# Altium PCB Buck-Boost-Converter_PCB.PcbDoc (part 1 of 2)
Units mm, origin at the board's own origin, x right, y up, seen from the top; angles counter-clockwise.
Board outline 189.74 x 81.03 mm, 4 copper layers (Top Layer, GND Layer, Pwr Layer, Bottom Layer), stack 2.398 mm thick; 93 components, 21 nets, 175 pads, 81 vias.
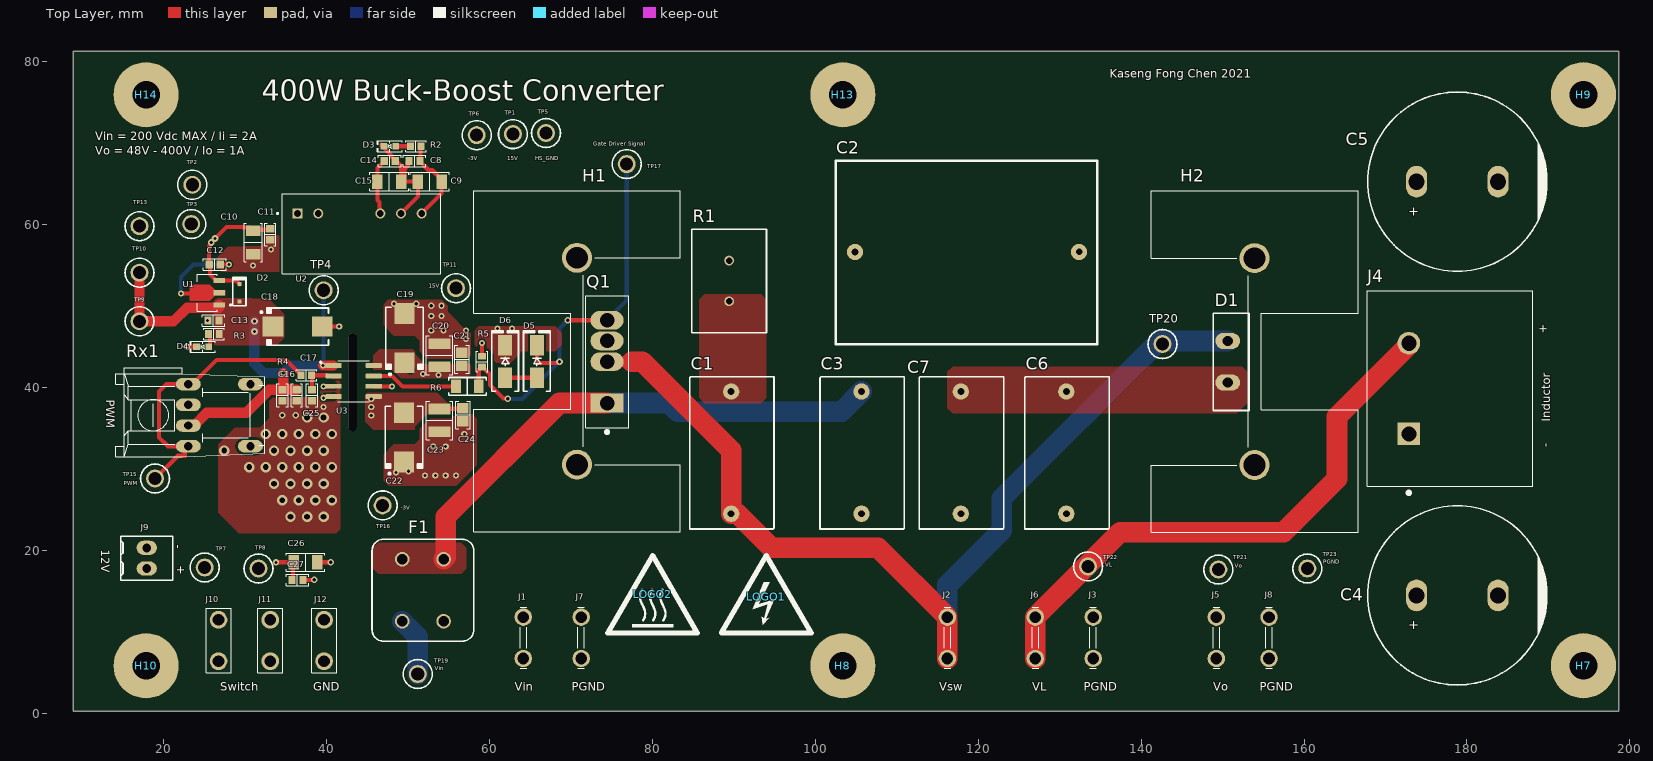
[diagram p0: Top Layer view]
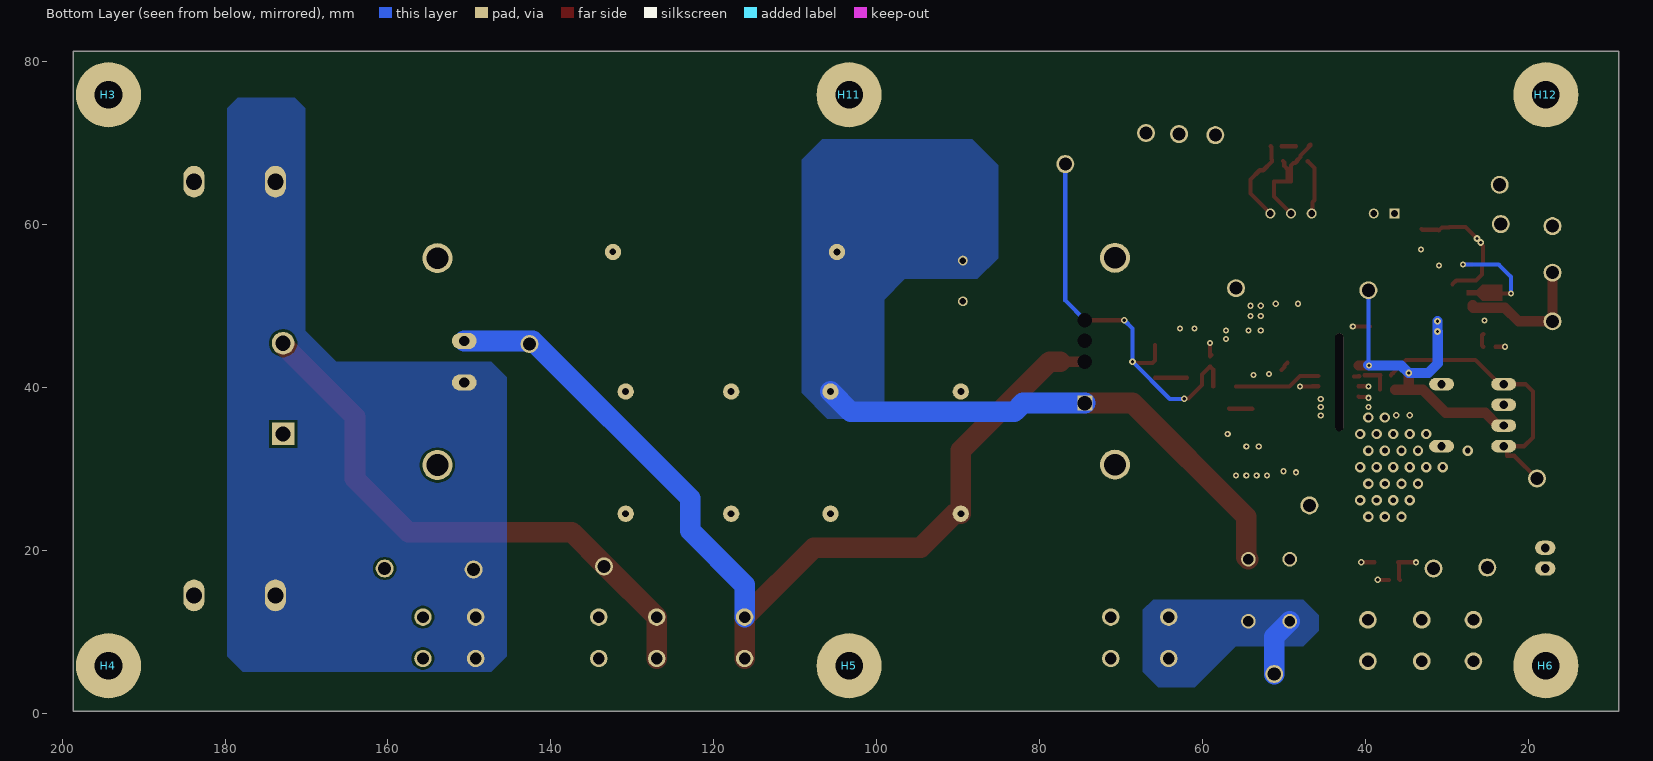
[diagram p1: Bottom Layer view, seen from below]
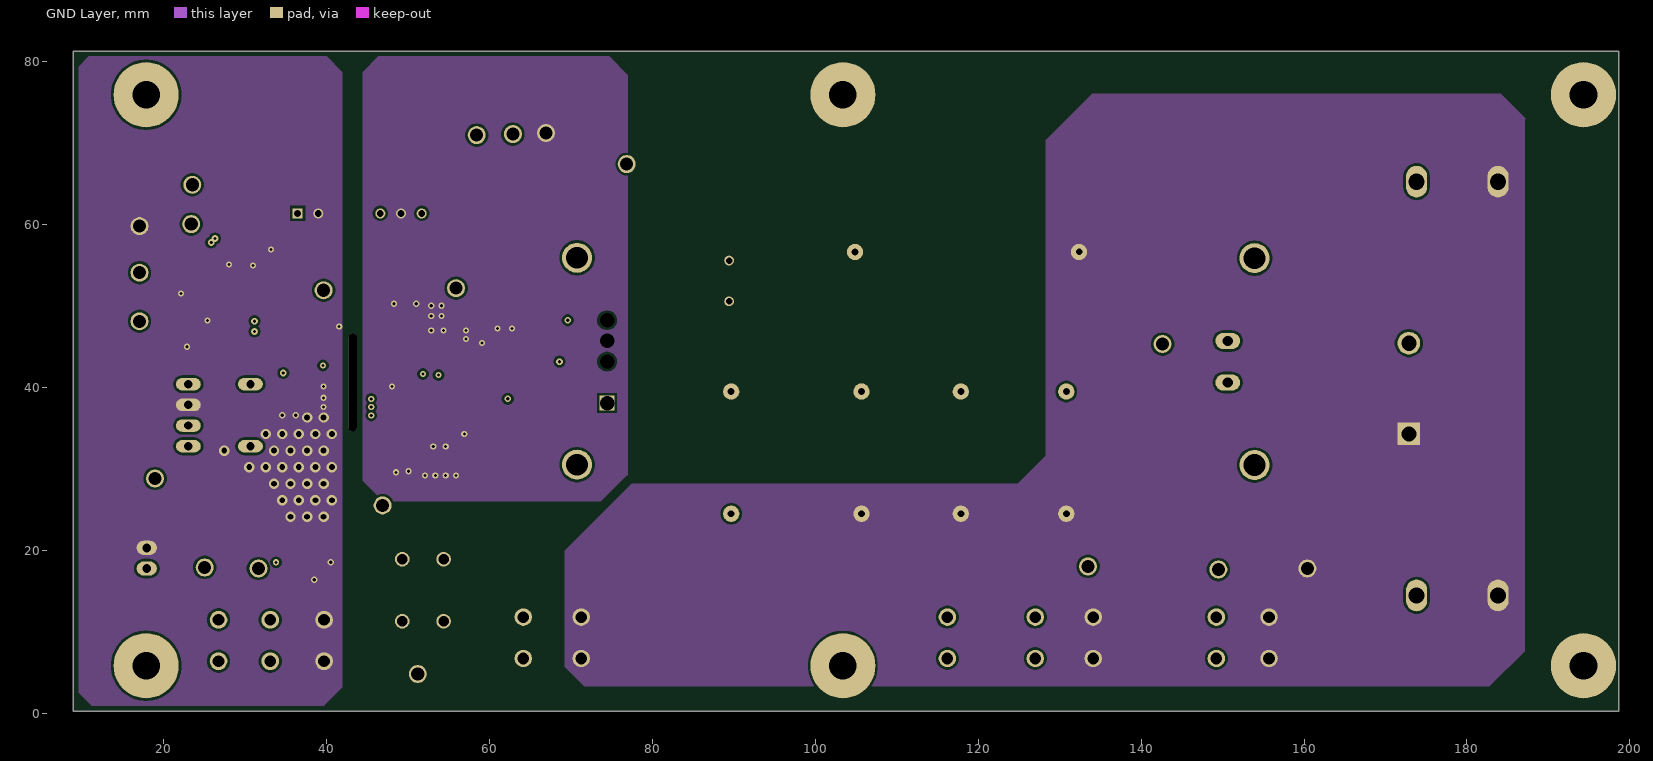
[diagram p2: GND Layer]
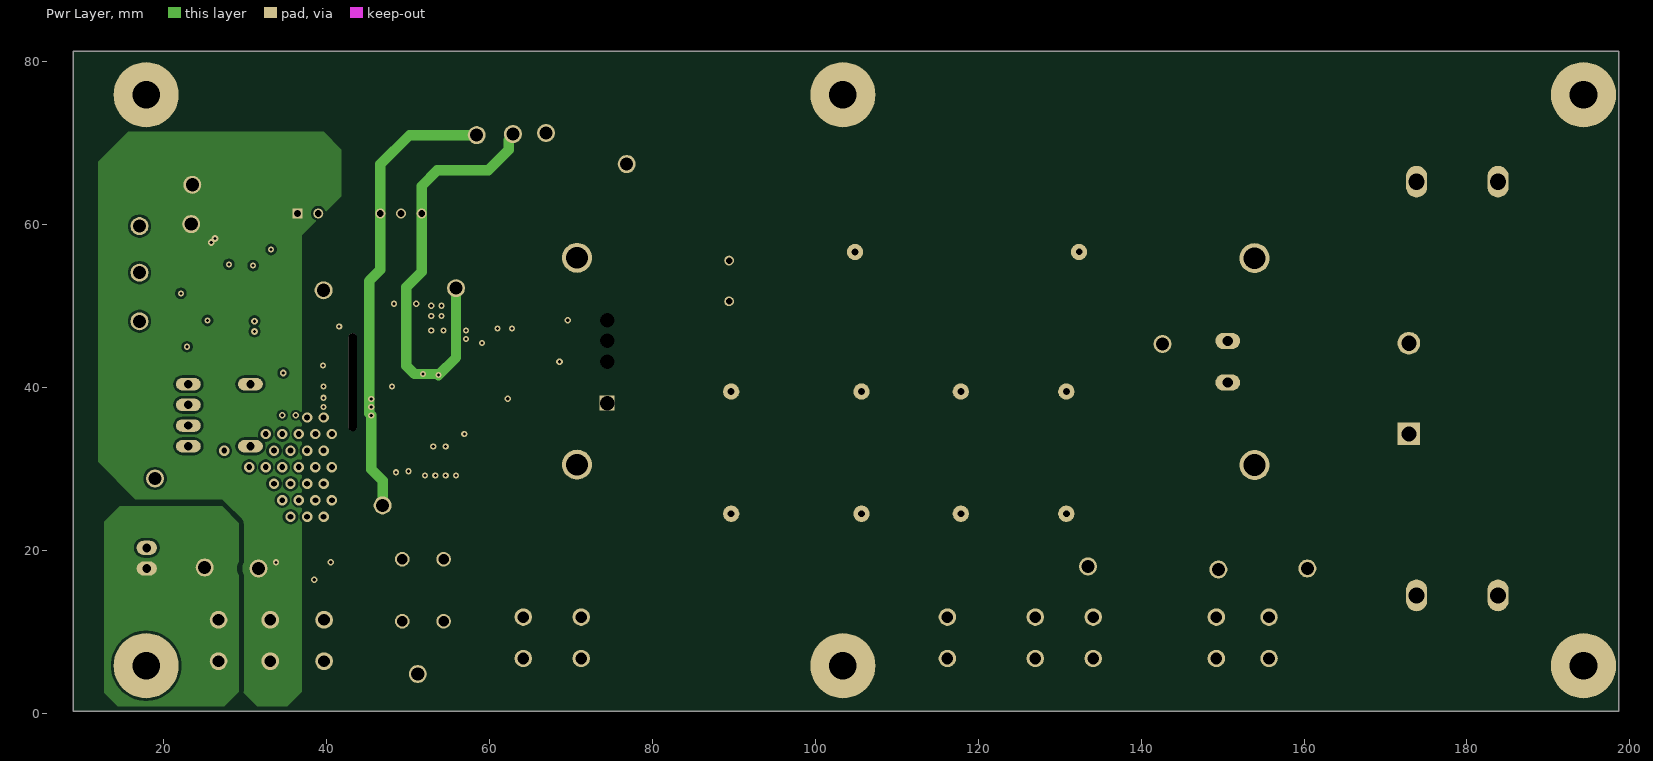
[diagram p3: Pwr Layer]
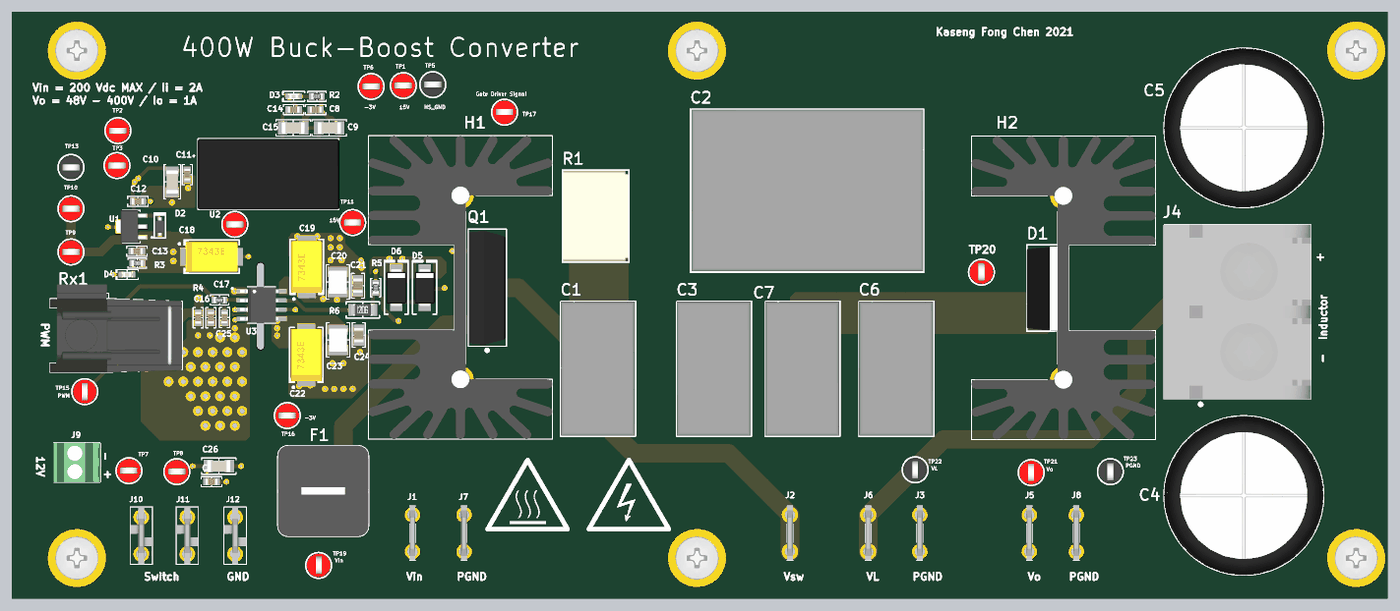
[diagram p4: 3D render of the assembled board from above, using the file's embedded part models]

## Layer stack, top to bottom
Top Solder: solder mask 0.0102, Solder Resist, Dk 3.5
Top Layer: signal copper 0.0711
Dielectric 1: prepreg 0.3048, FR-4-High Tg, Dk 4.2
GND Layer: signal copper 0.0711
Dielectric 2: core 1.5037, FR-4-High Tg, Dk 4.5
Pwr Layer: signal copper 0.0711
Dielectric 3: prepreg 0.3048, FR-4-High Tg, Dk 4.2
Bottom Layer: signal copper 0.0711
Bottom Solder: solder mask 0.0102, Solder Resist, Dk 3.5

## Board outline
8.89,0.254 198.628,0.254 198.628,81.28 8.89,81.28

## Design rules (kind name [scope] priority, off if disabled: settings)
AcuteAngle [All] p1: minimum=4.50000000000000E+0001 checktracksonly=FALSE
AssemblyTestPointUsage [All] p1: valid=2
BoardOutlineClearance BoardOutlineClearance_MountingHoles [OnCopper and InComponentClass('Mounting Holes')] p1: gap=1.016 ignorepadtopadclearanceinfootprint=FALSE
BoardOutlineClearance BoardOutlineClearance_Poly [OnCopper and IsPoly] p2: gap=0.635 ignorepadtopadclearanceinfootprint=FALSE
BoardOutlineClearance [OnCopper and Not InComponentClass('Logo') and not InComponentClass('FiducialMark') and not InRegion(1000,500,4000,800) and not InPoly] p3: gap=0 ignorepadtopadclearanceinfootprint=FALSE
Clearance Clearance_MH [InPadClass('mh')] p1: gap=1.5 ignorepadtopadclearanceinfootprint=FALSE except(0: Arc-Hole Track-Hole SMDPad-Hole THPad-Hole Via-Hole Fill-Hole Poly-Hole Region-Hole Text-Hole)
Clearance Clearance_HV_Bottom_Layer [InLayerClass('Bottom_Layer') and InPolygon vs InNetClass('HV_Class')] p2: gap=3 ignorepadtopadclearanceinfootprint=FALSE except(0: Arc-Hole Track-Hole SMDPad-Hole THPad-Hole Via-Hole Fill-Hole Poly-Hole Region-Hole Text-Hole)
Clearance Clearance_HV_TOP_Layer [InLayerClass('Top_Layer') and InPolygon vs InNetClass('HV_Class')] p3: gap=3 ignorepadtopadclearanceinfootprint=FALSE except(0: Arc-Hole Track-Hole SMDPad-Hole THPad-Hole Via-Hole Fill-Hole Poly-Hole Region-Hole Text-Hole)
Clearance Clearance_HV_PwrLayer [InLayerClass('PWR Class') and InPolygon vs InNetClass('HV_Class')] p4: gap=3 ignorepadtopadclearanceinfootprint=FALSE except(0: Arc-Hole Track-Hole SMDPad-Hole THPad-Hole Via-Hole Fill-Hole Poly-Hole Region-Hole Text-Hole)
Clearance Clearance_HV_GndLayer [InLayerClass('GND_Layer') and InPolygon vs InNetClass('HV_Class')] p5: gap=1.524 ignorepadtopadclearanceinfootprint=FALSE except(0: Arc-Hole Track-Hole SMDPad-Hole THPad-Hole Via-Hole Fill-Hole Poly-Hole Region-Hole Text-Hole)
Clearance "Clearance_Poly to Poly" [InPoly vs InPoly] p6: gap=0.635 ignorepadtopadclearanceinfootprint=FALSE except(0: Arc-Hole Track-Hole SMDPad-Hole THPad-Hole Via-Hole Fill-Hole Poly-Hole Region-Hole Text-Hole)
Clearance Clearance_Poly [InPolygon] p7: gap=0.305 ignorepadtopadclearanceinfootprint=FALSE except(0: Arc-Hole Track-Hole SMDPad-Hole THPad-Hole Via-Hole Fill-Hole Poly-Hole Region-Hole Text-Hole)
Clearance [All] p8: gap=0.2 ignorepadtopadclearanceinfootprint=FALSE except(0: Arc-Hole Track-Hole SMDPad-Hole THPad-Hole Via-Hole Fill-Hole Poly-Hole Region-Hole Text-Hole)
ComponentClearance ComponentClearance_MountingHoles_FiducialMarks [InComponentClass('Mounting Holes') vs InComponentClass('FiducialMark')] p1: gap=0.762 collisioncheckmode=3 verticalgap=0.254 showdistances=FALSE
ComponentClearance ComponentClearance_Shunt [InComponentClass('Header') vs InComponentClass('Shunt')] p2: gap=0 collisioncheckmode=3 verticalgap=0 showdistances=FALSE
ComponentClearance ComponentClearance_Logo [InComponentClass('Logo')] p3: gap=0.025 collisioncheckmode=3 verticalgap=0.025 showdistances=FALSE
ComponentClearance ComponentClearance_ScrewToNut [(HasFootprint('NY PMS 440 0025 PH')) vs (HasFootprint('Keystone_1902C'))] p4: gap=0.025 collisioncheckmode=3 verticalgap=0.025 showdistances=FALSE
ComponentClearance ComponentClearance_MountingHoles [InComponentClass('Mounting Holes')] p5: gap=0.762 collisioncheckmode=3 verticalgap=2540 showdistances=FALSE
ComponentClearance ComponentClearance_SmallPassives [HasFootprint('0201*') or HasFootprint('0402*') or HasFootprint('0508') or HasFootprint('0603*') or HasFootprint('0612') or HasFootprint('0805*') or HasFootprint('0815*') or HasFootprint('0830*') or HasFootprint('1206*') or HasFootprint('1210*') or HasFootprint('1808*') or HasFootprint('1812*') or HasFootprint('1825*') or HasFootprint('2010*') or HasFootprint('2220*') or HasFootprint('2225*') or HasFootprint('2512*') or HasFootprint('2728*') or HasFootprint('3518*') vs HasFootprint('0201*') or HasFootprint('0402*') or HasFootprint('0508') or HasFootprint('0603*') or HasFootprint('0612') or HasFootprint('0805*') or HasFootprint('0815*') or HasFootprint('0830*') or HasFootprint('1206*') or HasFootprint('1210*') or HasFootprint('1808*') or HasFootprint('1812*') or HasFootprint('1825*') or HasFootprint('2010*') or HasFootprint('2220*') or HasFootprint('2225*') or HasFootprint('2512*') or HasFootprint('2728*') or HasFootprint('3518*')] p6: gap=0 collisioncheckmode=3 verticalgap=0 showdistances=FALSE
ComponentClearance ComponentClearance_THtoSMT [IsThruComponent vs IsSMTComponent] p7: gap=0 collisioncheckmode=3 verticalgap=0 showdistances=FALSE
ComponentClearance ComponentClearance_THtoTH [IsThruComponent vs IsThruComponent] p8: gap=0 collisioncheckmode=3 verticalgap=0 showdistances=FALSE
ComponentClearance [All] p9: gap=0 collisioncheckmode=3 verticalgap=0 showdistances=FALSE
DiffPairsRouting [All] p1: maxlimit=0.254 minlimit=0.2 mostfreqgap=0.2 toplayer_minwidth=0.254 toplayer_maxwidth=0.254 toplayer_prefwidth=0.254 midlayer1_minwidth=0.254 midlayer1_maxwidth=0.254 midlayer1_prefwidth=0.254 midlayer2_minwidth=0.254 midlayer2_maxwidth=0.254 midlayer2_prefwidth=0.254 bottomlayer_minwidth=0.254 bottomlayer_maxwidth=0.254 bottomlayer_prefwidth=0.254 maxuncoupledlength=25.4
FabricationTestPointUsage TestPointUsage [All] p1: valid=2 allowmultiple=FALSE
FabricationTestpoint Testpoint [All] p1: side=3 testpointundercomponent=TRUE minsize=1.016 maxsize=2.54 preferedsize=1.524 minholesize=0 maxholesize=1.016 preferedholesize=0.813 testpointgrid=0.025 allowsidetop=TRUE allowsidebottom=TRUE usegrid=TRUE gridtolerance=0
FanoutControl Fanout_LCC [IsLCC] p1: bgadir=Out bgaviamode=Centered fanoutstyle=Auto fanoutdirection=Alternating viagrid=0.025 // Fanout_LCC (Default Rule)
FanoutControl Fanout_BGA [IsBGA] p2: bgadir=Out bgaviamode=Centered fanoutstyle=Auto fanoutdirection=Alternating viagrid=0.025 // Fanout_BGA (Default Rule)
FanoutControl Fanout_Default [All] p4: bgadir=Out bgaviamode=Centered fanoutstyle=Auto fanoutdirection=Alternating viagrid=0.025 // Fanout_Default (Default Rule)
FanoutControl Fanout_Small [(CompPinCount < 5)] p5: bgadir=Out bgaviamode=Centered fanoutstyle=Auto fanoutdirection=OutThenIn viagrid=0.025 // Fanout_Small (Default Rule)
Height [All] p1: minheight=0 maxheight=63.5 prefheight=12.7
HoleSize [All] p1: absolutevalues=TRUE maxlimit=25.4 minlimit=0.2 maxpercent=80.000 minpercent=20.000
MinimumAnnularRing MinimumAnnularRing_ThermalPadVias [IsVia and InAnyComponent] p1: minimumring=0.15
MinimumAnnularRing [All] p2: minimumring=0.14
MinimumSolderMaskSliver MinimumSolderMaskSliver_Logo [InComponentClass('Logo') vs InComponentClass('Logo')] p1: minsoldermaskwidth=0.018
MinimumSolderMaskSliver [All] p2: minsoldermaskwidth=0.1
PlaneConnect [All] p1: planeconnectstyle=Direct reliefexpansion=0.254 reliefentries=4 reliefconductorwidth=0.254 reliefairgap=0.254
PolygonConnect [All] p1: connectstyle=Direct reliefconductorwidth=0.254 reliefentries=4 polygonreliefangle="90 Angle" airgapwidth=0.254
RoutingVias ThermalPadVias [IsVia and InAnyComponent] p1: holewidth=0.2 width=0.5 viastyle="Through Hole" minholewidth=0.2 minwidth=0.5 maxholewidth=0.33 maxwidth=0.6
RoutingVias [All] p2: holewidth=0.406 width=0.813 viastyle="Through Hole" minholewidth=0.305 minwidth=0.61 maxholewidth=0.711 maxwidth=1.321
SilkToSilkClearance SilkToSilkClearance_Pb-FreeLogo [(HasFootprint('Pb-Free_Overlay_Medium') OR HasFootprint('Pb-Free_Overlay_Small')) vs (HasFootprint('Pb-Free_Overlay_Medium') OR HasFootprint('Pb-Free_Overlay_Small'))] p1: silktosilkclearance=0
SilkToSilkClearance [All] p2: silktosilkclearance=0.102
SilkToSolderMaskClearance SilkToComponentPadClearance [(IsPad or IsFill or IsRegion) and InAnycomponent] p1: minsilkscreentomaskgap=0.127 clearancetoexposedcopper=TRUE
SilkToSolderMaskClearance "Silk to Solder Mask Opening" [All] p2: minsilkscreentomaskgap=0.102 clearancetoexposedcopper=FALSE
SolderMaskExpansion [All] p1: expansion=0.05 istentingtop=FALSE
Width [All] p1: maxlimit=2.54 minlimit=0.229 preferedwidth=0.508 checkconnectedcopper=TRUE
15 further rules are at their usual default settings.

## Classes and differential pairs
component class Hardware: H3 H4 H5 H6 H7 H8 H9 H10 H11 H12 H13 H14 LOGO1 LOGO2
component class GateDriver: C8 C9 C10 C11 C12 C13 C14 C15 C16 C17 C18 C19 C20 C21 C22 C23 C24 C25 C26 C27 D2 D3 D4 D5 D6 J9 J10 J11 J12 R2 R3 R4 R5 R6 Rx1 TP1 TP2 TP3 TP4 TP5 TP6 TP7 TP8 TP9 TP10 TP11 TP13 TP15 TP16 TP17 U1 U2 U3
component class PowerCard: C1 C2 C3 C4 C5 C6 C7 D1 F1 H1 H2 J1 J2 J3 J4 J5 J6 J7 J8 L1 Q1 R1 TP19 TP20 TP21 TP22 TP23

## Components (designator, comment, footprint, x,y, rotation, side; value= is the part's Value field where it differs from the comment)
C1 "220nF" R75PI32204030J 89.662,32.004 r270 top
C2 "25uF" C4AQLBU5250A12K 118.618,56.642 r0 top
C3 "220nF" R75PI32204030J 105.664,32.004 r270 top
C4 "100uF" CAP_MXC_22x35_RUB 178.816,14.478 r180 top
C5 "100uF" CAP_MXC_22x35_RUB 178.816,65.278 r180 top
C6 "220nF" R75PI32204030J 130.81,32.004 r270 top
C7 "220nF" R75PI32204030J 117.856,32.004 r270 top
C8 "1µF" "CAP 0603_1608" 50.785,67.793 r0 top
C9 "10µF" "CAP 1206_3216 - 1.8MM" 52.652,65.278 r0 top
C10 "4.7µF" "CAP 1206_3216 - 1.8MM" 30.988,57.808 r90 top
C11 "0.1µF" "CAP 0603_1608" 33.071,58.801 r90 top
C12 "1µF" "CAP 0603_1608" 26.238,55.118 r180 top
C13 "1µF" "CAP 0603_1608" 26.1,48.235 r0 top
C14 "1µF" "CAP 0603_1608" 47.737,67.793 r0 top
C15 "10µF" "CAP 1206_3216 - 1.8MM" 47.678,65.278 r0 top
C16 "0.1µF" "CAP 0603_1608" 34.569,39.04 r90 top
C17 "0.1µF" "CAP 0603_1608" 36.322,39.051 r90 top
C18 "10µF" "CAP POL 2917_7343" 36.424,47.473 r0 top
C19 "10µF" "CAP POL 2917_7343" 49.555,46.076 r90 top
C20 "10µF" "CAP 1210_3225 - 2.8MM" 53.823,43.967 r90 top
C21 "0.22µF" "CAP 0805_2012" 56.591,43.472 r90 top
C22 "10µF" "CAP POL 2917_7343" 49.479,33.884 r90 top
C23 "10µF" "CAP 1210_3225 - 2.8MM" 53.873,35.963 r90 top
C24 "0.22µF" "CAP 0805_2012" 56.718,36.64 r90 top
C25 "100pF" "CAP 0603_1608" 38.202,39.065 r90 top
C26 "4.7µF" "CAP 1206_3216 - 1.8MM" 37.412,18.542 r180 top
C27 "0.1µF" "CAP 0603_1608" 36.409,16.383 r180 top
D1 "Schottky Diode" C6D06065A 150.622,43.053 r90 top
D2 "PMEG6010CEJ,115" SOD-323F 29.286,51.638 r270 top
D3 "Green" "LED 0603_1608 GREEN" 47.74,69.621 r180 top
D4 "Green" "LED 0603_1608 GREEN" 24.765,45.009 r180 top
D5 "SMAJ5.0A" "DO214AC SMA" 65.811,43.205 r90 top
D6 "SMAJ16A" "DO214AC SMA" 61.9,43.205 r90 top
F1 "3101.0040" SCHURTER_3101_0040 51.816,15.113 r180 top
H1 "Disipador de 3.3.C/W" HSINK_6399BG 70.739,43.231 r90 top
H2 "Disipador de 3.3.C/W" HSINK_6399BG 153.924,43.18 r270 top
H3 "24438" Keystone24438 194.31,75.946 r180 bottom
H4 "24438" Keystone24438 194.31,5.842 r180 bottom
H5 "24438" Keystone24438 103.378,5.842 r180 bottom
H6 "24438" Keystone24438 17.831,5.842 r180 bottom
H7 "MPMS 003 0005 PH" BuildingFastener_MPMS_003_0005_PH 194.31,5.842 r0 top
H8 "MPMS 003 0005 PH" BuildingFastener_MPMS_003_0005_PH 103.378,5.842 r0 top
H9 "MPMS 003 0005 PH" BuildingFastener_MPMS_003_0005_PH 194.31,75.946 r0 top
H10 "MPMS 003 0005 PH" BuildingFastener_MPMS_003_0005_PH 17.831,5.842 r0 top
H11 "24438" Keystone24438 103.378,75.946 r0 bottom
H12 "24438" Keystone24438 17.831,75.946 r0 bottom
H13 "MPMS 003 0005 PH" BuildingFastener_MPMS_003_0005_PH 103.378,75.946 r180 top
H14 "MPMS 003 0005 PH" BuildingFastener_MPMS_003_0005_PH 17.831,75.946 r180 top
J1 "Faston  .250" TE_62409-1 64.135,9.271 r90 top
J2 "Faston  .250" TE_62409-1 116.205,9.271 r90 top
J3 "Faston  .250" TE_62409-1 134.112,9.271 r90 top
J4 "2P Terminal,  12-20  AWG" TE_8PCV-02-006 172.86,39.878 r90 top
J5 "Faston  .250" TE_62409-1 149.225,9.271 r90 top
J6 "Faston  .250" TE_62409-1 127,9.271 r90 top
J7 "Faston  .250" TE_62409-1 71.247,9.271 r270 top
J8 "Faston  .250" TE_62409-1 155.702,9.271 r270 top
J9 "282834-2" "TE 282834-2" 17.907,19.05 r90 top
J10 "Faston .183" TE_1217133-1 26.721,8.941 r90 top
J11 "Faston .183" TE_1217133-1 33.071,8.941 r90 top
J12 "Faston .183" TE_1217133-1 39.675,8.941 r90 top
LOGO1 "DANGER HIGH VOLTAGE" IEC_HighVoltage_Medium 93.98,14.3 r0 top
LOGO2 "CAUTION HOT SURFACE" IEC_HotSurface_Medium 80.01,14.605 r0 top
Q1 "C3M0045065K" TO-247-4L_C3M0075120K_WFS 74.422,38.1 r90 top
R1 "Wirewound, Snubber" "Wirewound Resistors 47 Ohms 7W 300PPM" 89.408,53.086 r270 top
R2 "10 kOhms" "RES 0603_1608" 50.952,69.621 r180 top
R3 "10 kOhms" "RES 0603_1608" 26.162,46.584 r180 top
R4 "100 Ohms" "RES 0603_1608" 37.505,41.504 r0 top
R5 "2.7 Ohms" "RES 1206_3216" 57.274,40.132 r0 top
R6 "20 kOhms" "RES 0603_1608" 59.055,43.195 r270 top
Rx1 "HFBR-2531Z" HFBR-15X1V 32.41,36.601 r90 top
TP1 "5010" Keystone5010 62.865,71.12 r270 top
TP2 "5010" Keystone5010 23.495,64.897 r270 top
TP3 "5010" Keystone5010 23.368,60.071 r270 top
TP4 "5010" Keystone5010 39.624,51.943 r270 top
TP5 "5011" Keystone5011 66.929,71.247 r270 top
TP6 "5010" Keystone5010 58.42,70.993 r270 top
TP7 "5010" Keystone5010 25.019,17.907 r270 top
TP8 "5010" Keystone5010 31.623,17.78 r270 top
TP9 "5010" Keystone5010 17.018,48.133 r270 top
TP10 "5010" Keystone5010 17.018,54.102 r270 top
TP11 "5010" Keystone5010 55.88,52.197 r270 top
TP13 "5011" Keystone5011 17.018,59.817 r270 top
TP15 "5010" Keystone5010 18.923,28.829 r180 top
TP16 "5010" Keystone5010 46.863,25.527 r270 top
TP17 "5010" Keystone5010 76.835,67.437 r270 top
TP19 "5010" Keystone5010 51.181,4.826 r180 top
TP20 "5010" Keystone5010 142.621,45.339 r180 top
TP21 "5010" Keystone5010 149.479,17.653 r180 top
TP22 "5011" Keystone5011 133.477,18.034 r180 top
TP23 "5011" Keystone5011 160.401,17.78 r180 top
U1 "L78L05ACUTR" VREG_L78L12ABUTR 25.349,51.638 r180 top
U2 "R15P21503D" CONV_R15P21503D 44.272,58.877 r0 top
U3 "UCC5390ECD" SOIC127P599X175-8N 43.307,40.792 r0 top

## Footprints (in the part's own frame and the unit in brackets; to place one, negate y for a bottom-side part, rotate by r counter-clockwise, add the part's x,y. Pads: shape width x height; smd on the part's side, far side on the other; paste and mask are expansions set on the pad)
BuildingFastener_MPMS_003_0005_PH [mil] "MACHINE SCREW PAN PHILLIPS M3"
  round 1 on Mech3: 0(0,0)
  body extent -118,-118 118,118, height 93
C4AQLBU5250A12K [mm] "Film Capacitor KEMET"
  round 2 hole 0.85 paste+0 mask+0: 1(-13.75,0)
  round 2 hole 0.8 paste+0 mask+0: 2(13.75,0)
  silkscreen extent -16.13,-11.3 16,11.18, body extent -16,-11.15 16,11.15, height 37.21
C6D06065A [mm] "To-220-2,C6D06065A,"
  oval 2x3.048 hole 1.27 paste+0 mask+0: 1(2.667,0) 2(-2.44,0)
  silkscreen extent -5.87,-2.66 6.05,1.75, body extent -5.94,-2.65 5.94,1.75, height 19.11
"CAP 0603_1608" [mm] "Chip Capacitor, 2-Leads, Body 1.60x0.80mm, IPC Medium Density"
  rect 0.9x1 smd: 1(-0.675,0) 2(0.675,0)
  silkscreen extent -1.4,-0.7 1.4,0.7, body extent -0.8,-0.41 0.8,0.41, height 0.82
"CAP 0805_2012" [mm] "Chip Capacitor, 2-Leads, Body 2.00x1.20mm, IPC Medium Density"
  rect 1.3x1.4 smd: 1(-0.8,0) 2(0.8,0)
  silkscreen extent -1.7,-0.9 1.7,0.9, body extent -1,-0.64 1,0.64, height 1.26
"CAP 1206_3216 - 1.8MM" [mm] "Chip Capacitor, 2-Leads, Body 3.25x1.60mm, IPC Medium Density"
  rect 1.3x1.8 smd: 1(-1.45,0) 2(1.45,0)
  silkscreen extent -2.37,-1.12 2.37,1.12, body extent -1.6,-0.8 1.6,0.8, height 1.8
"CAP 1210_3225 - 2.8MM" [mm] "Chip Capacitor, 2-Leads, Body 3.20x2.50mm, IPC Medium Density"
  rect 1.3x2.7 smd: 1(-1.4,0) 2(1.4,0)
  silkscreen extent -2.37,-1.63 2.37,1.63, body extent -1.6,-1.25 1.6,1.25, height 2.8
"CAP POL 2917_7343" [mm] "Molded Capacitor, 2-Leads, Body 7.30x4.30mm, IPC Medium Density"
  rect 2.55x2.45 smd: 1(-3.025,0) 2(3.025,0)
  silkscreen extent -4.57,-2.3 3.8,2.3, body extent -3.65,-2.15 3.65,2.15, height 4.1
CAP_MXC_22x35_RUB [mm] "22mm Diameter 10mm Lead Spacing Aluminum Electrolytic Capacitors Radial, Can , Snap-In"
  oval 2.6x3.9 hole 2: 1(5,0) 2(-5,0)
  silkscreen extent -11,-11 11,11, body extent -11,-11 11.01,11, height 37
CONV_R15P21503D [mm]
  rect 1.23x1.23 hole 0.82: 1(-7.85,2.5)
  round 1.23 hole 0.82: 2(-5.31,2.5) 5(2.31,2.5) 6(4.85,2.5) 7(7.39,2.5)
  silkscreen extent -10.4,-4.9 9.75,4.9, body extent -9.75,-4.91 9.75,4.9, height 12.01
"DO214AC SMA" [mm] "Molded Diode, 2-Leads, Body 4.30x2.60mm, IPC Medium Density"
  rect 2.5x1.7 smd: 1(-2,0) 2(2,0)
  silkscreen extent -3.68,-1.65 3.75,1.65, body extent -2.6,-1.37 2.6,1.37, height 2.4
HFBR-15X1V [mil]
  oval 60x120 hole 40: 1(150,370) 2(50,370) 3(-50,370) 4(-150,370) 5(-150,70) 8(150,70)
  silkscreen extent -200,0 230,720, body extent -202,2 279,722, height 740
HSINK_6399BG [mm]
  round 3.686 hole 2.67: 1(-12.7,0) 2(12.7,0)
  silkscreen extent -20.95,-12.7 20.95,12.7, body extent -20.95,-12.7 20.96,12.7, height 50.81
IEC_HighVoltage_Medium [mm]
  silkscreen extent -5.51,-4.46 5.51,5.09
IEC_HotSurface_Medium [mm]
  silkscreen extent -5.51,-4.76 5.51,4.78
Keystone5010 [mil]
  round 87 hole 63: 1(0,0)
  silkscreen extent -70,-70 70,70, body extent -63,-63 63,62, height 319
Keystone5011 [mil]
  round 87 hole 63: 1(0,0)
  silkscreen extent -70,-70 70,70, body extent -63,-63 63,62, height 319
Keystone24438 [mil] "Standoff, Aluminium, M3x0.5mm, L 25 mm"
  round 1 on Mech3: 0(0,0)
  body extent -98,-114 98,114, height 984
"LED 0603_1608 GREEN" [mm] "Chip Diode, 2-Leads, Body 1.60x0.80mm, IPC Medium Density"
  rect 0.8x0.8 smd: 1(-0.75,0) 2(0.75,0)
  silkscreen extent -1.52,-0.7 1.52,0.7, body extent -0.8,-0.4 0.8,0.4, height 0.53
R75PI32204030J [mm] "KEMET Film capacitor"
  round 2 hole 0.85 paste+0 mask+0: 1(-7.5,0) 2(7.5,0)
  silkscreen extent -9.33,-5.1 9.38,5.25, body extent -9.25,-5.08 9.25,5.13, height 16.11
"RES 0603_1608" [mm] "Chip Resistor, 2-Leads, Body 1.60x0.80mm, IPC Medium Density"
  rect 0.85x0.95 smd: 1(-0.65,0) 2(0.65,0)
  silkscreen extent -1.27,-0.7 1.27,0.7, body extent -0.8,-0.4 0.8,0.4, height 0.45
"RES 1206_3216" [mm] "Chip Resistor, 2-Leads, Body 3.13x1.55mm, IPC Medium Density"
  rect 1.2x1.65 smd: 1(-1.4,0) 2(1.4,0)
  silkscreen extent -2.3,-1.1 2.3,1.1, body extent -1.6,-0.8 1.6,0.8, height 0.6
SCHURTER_3101_0040 [mm] "Fuse Holder, Body 12.5x12.5mm, TH"
  round 1.8 hole 1.3: 1(-2.54,3.81) 2(2.54,3.81) 3(2.54,-3.81) 4(-2.54,-3.81)
  silkscreen extent -6.25,-6.25 6.25,6.25, body extent -6.25,-6.25 6.25,6.25, height 32.6
SOD-323F [mm]
  rect 0.5x0.5 smd: 1(-1.05,0) 2(1.05,0)
  silkscreen extent -1.9,-0.8 1.6,0.8, body extent -1.25,-0.62 1.25,0.63, height 0.81
SOIC127P599X175-8N [mm]
  rrect25% 1.97x0.6 smd: 1(-2.47,1.905) 2(-2.47,0.635) 3(-2.47,-0.635) 4(-2.47,-1.905) 5(2.47,-1.905) 6(2.47,-0.635) 7(2.47,0.635) 8(2.47,1.905)
  silkscreen extent -4.14,-2.52 1.95,2.52, body extent -2.99,-2.45 3.11,2.45, height 1.76
"TE 282834-2" [mm]
  oval 1.75x2.5 hole 1.1: 1(-1.27,0) 2(1.27,0)
  silkscreen extent -2.7,-3.2 2.7,3.2, body extent -2.77,-3.25 2.77,3.25, height 10
TE_8PCV-02-006 [mil]
  rect 109.5x109.5 hole 73: 1(-219,0)
  round 109.5 hole 73: 2(219,0)
  silkscreen extent -512,-600 474,200, body extent -474,-600 474,200, height 770
TE_62409-1 [mm]
  round 2.145 hole 1.43: 1(-2.54,0) 1(2.54,0)
  silkscreen extent -3.75,-0.4 3.75,0.4, body extent -3.75,-0.4 3.75,0.4, height 12.64
TE_1217133-1 [mm]
  round 2.175 hole 1.45: 1(-2.54,0) 1(2.54,0)
  silkscreen extent -3.96,-1.54 3.96,1.54, body extent -3.96,-1.54 3.96,1.54, height 8.9
TO-247-4L_C3M0075120K_WFS [mm]
  rect 2.29x4.06 / inner rect 1.829x1.829 / far side rect 1.829x1.829 hole 1.78 mask+0: 1(0,0)
  oval 2.29x4.06 / inner round 1.575 / far side round 1.575 hole 1.78 mask+0: 2(5.08,0) 3(7.62,0) 4(10.16,0)
  silkscreen extent -3.76,-2.68 13.18,2.61, body extent -2.82,-2.55 12.98,2.45, height 25.13
VREG_L78L12ABUTR [mm]
  rect 1.4x0.57 smd: 1(-1.475,1.5) 3(-1.475,-1.5)
  rect 1.4x0.65 smd paste-2 mask+0: 2(-1.475,0)
  Top Layer region: 2.175,-1 -0.275,-1 -0.95,-0.325 -2.175,-0.325 -2.175,0.325 -0.95,0.325 -0.275,1 2.175,1
  silkscreen extent -2.95,-2.25 1.22,2.25, body extent -2.01,-2.25 2.08,2.25, height 1.61
"Wirewound Resistors 47 Ohms 7W 300PPM" [mm]
  round 1.2 hole 0.8: 1(-2.5,0) 2(2.5,0)
  silkscreen extent -6.35,-4.6 6.35,4.6, body extent -6.25,-4.5 6.25,4.5, height 39.01

## Part data
C1 C3 C6 C7: library part R75PI32204030J, "KEMET         R75PI32204030J            Film Capacitor, AEC-Q200 R75 Series, 0.22 F,  5%, PP (Polypropylene), 630 V", Case/Package=Radial, Dielectric=PP, Manufacturer=KEMET, Max Operating Temperature=105°C, Min Operating Temperature=-55°C, Supplier Part Number 1=399-12761-ND, Tolerance=5%, Voltage=630V, Voltage Rating (AC)=250V, Capacitance=220nF, Category="Film Capacitors", ComponentLink1Description=http://www.alliedelec.com/m/d/0659d349de7ca29105b1b70da899f791.pdf?src-supplier=Allied+Electronics, ComponentLink1URL=http://www.alliedelec.com/m/d/0659d349de7ca29105b1b70da899f791.pdf?src-supplier=Allied+Electronics, ComponentLink2Description=http://www.farnell.com/datasheets/2120989.pdf?src-supplier=Farnell, ComponentLink2URL=http://www.farnell.com/datasheets/2120989.pdf?src-supplier=Farnell, ComponentLink3Description=http://www.kemet.com/docfinder?Partnumber=R75PI32204030J&src-supplier=Digi-Key, ComponentLink3URL=http://www.kemet.com/docfinder?Partnumber=R75PI32204030J&src-supplier=Digi-Key, ComponentLink4Description=http://www.farnell.com/datasheets/2068064.pdf?src-supplier=Element14, ComponentLink4URL=http://www.farnell.com/datasheets/2068064.pdf?src-supplier=Element14, Depth=10mm, Dielectric Material=PP, Dissipation Factor=0.05%, Height=16mm, Height - Seated (Max)=0.634inch, Lead Diameter=0.8mm, Lead Length=30mm, Lead Pitch=15mm, Length=0.709inch, Manufacturer Part Number=R75PI32204030J, Mount="Through Hole", Packaging=Bulk, Pricing 1="1=0,95000, 10=0,72000, 50=0,59800, 100=0,51490, 500=0,39860, 1000=0,34324, 2500=0,32110, 5000=0,31002 (USD)", REACH SVHC="No SVHC", RoHS=Yes, RoHS Compliant=Yes, Stock 1=488, Supplier 1=Digi-Key, Termination="PC Pins", Voltage Rating=630V, Voltage Rating (DC)=630V, Width=0.394inch
C2: library part C4AQLBU5250A12K, "KEMET   C4AQLBU5250A12K.   CAP FILM 25UF 10% 500VDC RADIAL", Manufacturer=KEMET, Supplier Part Number 1=399-16989-ND, Category="Film Capacitors", Manufacturer Part Number=C4AQLBU5250A12K, Pricing 1="1=7,00000, 10=6,21800, 50=5,44060, 100=4,97440, 500=4,35256 (USD)", RoHS=Yes, RoHS Compliant=Yes, Stock 1=99, Supplier 1=Digi-Key
C4 C5: library part 475MXH100MEFCSN22X35, "Cap Aluminum Lytic 100uF 475V 20% (22 X 35mm) Snap-In 10mm 880mA 2000h 105C", Case/Package=Radial, Manufacturer=Rubycon, Max Operating Temperature=105°C, Min Operating Temperature=-25°C, Ripple Current=880mA, Supplier Part Number 1=1189-3424-ND, Tolerance=20%, Voltage Rating=475V, Capacitance=100uF, Category="Aluminum Electrolytic Capacitors", ComponentLink1Description=http://www.rubycon.co.jp/en/catalog/e_pdfs/aluminum/e_MXH.pdf?src-supplier=Digi-Key, ComponentLink1URL=http://www.rubycon.co.jp/en/catalog/e_pdfs/aluminum/e_MXH.pdf?src-supplier=Digi-Key, Height - Seated (Max)=1.457inch, Lead Pitch=0.394inch, Life (Hours)=2000Hour, Manufacturer Part Number=475MXH100MEFCSN22X35, Mount="Through Hole", Packaging=Bulk, Polarity=Polar, Pricing 1="1=3,65000, 10=3,53900, 50=3,13740, 100=2,84560, 500=2,11598, 1000=1,97004, 2500=1,89708, 5000=1,86059 (USD)", RoHS=Yes, RoHS Compliant=Yes, Stock 1=187, Supplier 1=Digi-Key
C8 C14: library part UMK107AB7105KA-T, "CAP CER 1UF 50V X7R 0603", Device Package="0603 (1608 Metric)", Manufacturer="Taiyo Yuden", Operating Temperature="-55°C ~ 125°C", Supplier Part Number 1=587-3247-1-ND, Temperature Coefficient=X7R, Tolerance=±10%, Voltage - Rated=50V, Applications="General Purpose", Capacitance=1µF, ComponentLink1Description=Datasheet, ComponentLink1URL=https://www.yuden.co.jp/productdata/catalog/mlcc01_e.pdf, ComponentLink2Description="DigiKey Link", ComponentLink2URL=http://digikey.com/product-detail/en/taiyo-yuden/UMK107AB7105KA-T/587-3247-1-ND/3660107, LastUpdated="2/9/2020 01:03:17", Lifecycle Status=Active, Minimum Order=1, Mounting Type="Surface Mount, MLCC", Package / Case="0603 (1608 Metric)", Packaging=TapeAndReel, Part Number=UMK107AB7105KA-T, Part Status=Active, PartId=12796, Price=0.05, Series=M, Size / Dimension="0.063\" L x 0.031\" W (1.60mm x 0.80mm)", Supplier 1=DigiKey, Thickness (Max)="0.037\" (0.95mm)"
C9 C15: library part TMK316AB7106KL-T, "CAP CER 10UF 25V X7R 1206", Device Package="1206 (3216 Metric)", Manufacturer="Taiyo Yuden", Operating Temperature="-55°C ~ 125°C", Supplier Part Number 1=587-3486-1-ND, Temperature Coefficient=X7R, Tolerance=±10%, Voltage - Rated=25V, Applications="General Purpose", Capacitance=10µF, ComponentLink1Description=Datasheet, ComponentLink1URL=https://www.yuden.co.jp/productdata/catalog/mlcc01_e.pdf, ComponentLink2Description="DigiKey Link", ComponentLink2URL=http://digikey.com/product-detail/en/taiyo-yuden/TMK316AB7106KL-T/587-3486-1-ND/4157519, LastUpdated="2/9/2020 01:05:40", Lifecycle Status=Active, Minimum Order=1, Mounting Type="Surface Mount, MLCC", Package / Case="1206 (3216 Metric)", Packaging=TapeAndReel, Part Number=TMK316AB7106KL-T, Part Status=Active, PartId=20052, Price=0.08, Series=M, Size / Dimension="0.126\" L x 0.063\" W (3.20mm x 1.60mm)", Supplier 1=DigiKey, Thickness (Max)="0.071\" (1.80mm)"
C10 C26: library part UMK316AB7475KL-T, "CAP CER 4.7UF 50V X7R 1206", Device Package="1206 (3216 Metric)", Manufacturer="Taiyo Yuden", Operating Temperature="-55°C ~ 125°C", Supplier Part Number 1=587-2994-1-ND, Temperature Coefficient=X7R, Tolerance=±10%, Voltage - Rated=50V, Applications="General Purpose", Capacitance=4.7µF, ComponentLink1Description=Datasheet, ComponentLink1URL=https://www.yuden.co.jp/productdata/catalog/mlcc01_e.pdf, ComponentLink2Description="DigiKey Link", ComponentLink2URL=http://digikey.com/product-detail/en/taiyo-yuden/UMK316AB7475KL-T/587-2994-1-ND/2714187, LastUpdated="2/9/2020 01:05:40", Lifecycle Status=Active, Minimum Order=1, Mounting Type="Surface Mount, MLCC", Package / Case="1206 (3216 Metric)", Packaging=TapeAndReel, Part Number=UMK316AB7475KL-T, Part Status=Active, PartId=20094, Price=0.08, Series=M, Size / Dimension="0.126\" L x 0.063\" W (3.20mm x 1.60mm)", Supplier 1=DigiKey, Thickness (Max)="0.071\" (1.80mm)"
C11 C16 C17 C27: library part C0603C104M5RACTU, "CAP CER 0.1UF 50V X7R 0603", Device Package="0603 (1608 Metric)", Manufacturer=KEMET, Operating Temperature="-55°C ~ 125°C", Supplier Part Number 1=399-7845-1-ND, Temperature Coefficient=X7R, Tolerance=±20%, Voltage - Rated=50V, Applications="Bypass, Decoupling", Capacitance=0.1µF, ComponentLink1Description=Datasheet, ComponentLink1URL=https://api.kemet.com/component-edge/download/datasheet/C0603C104M5RACTU.pdf, ComponentLink2Description="DigiKey Link", ComponentLink2URL=http://digikey.com/product-detail/en/kemet/C0603C104M5RACTU/399-7845-1-ND/3471568, LastUpdated="2/9/2020 01:03:01", Lifecycle Status=Active, Minimum Order=1, Mounting Type="Surface Mount, MLCC", Package / Case="0603 (1608 Metric)", Packaging=TapeAndReel, Part Number=C0603C104M5RACTU, Part Status=Active, PartId=17854, Price=0.01, Series="SMD Comm X7R", Size / Dimension="0.063\" L x 0.031\" W (1.60mm x 0.80mm)", Supplier 1=DigiKey, Thickness (Max)="0.034\" (0.87mm)"
C12: library part TMK107B7105KA-T, "CAP CER 1UF 25V X7R 0603", Device Package="0603 (1608 Metric)", Manufacturer="Taiyo Yuden", Operating Temperature="-55°C ~ 125°C", Supplier Part Number 1=587-2984-1-ND, Temperature Coefficient=X7R, Tolerance=±10%, Voltage - Rated=25V, Applications="General Purpose", Capacitance=1µF, ComponentLink1Description=Datasheet, ComponentLink1URL=https://www.yuden.co.jp/productdata/catalog/mlcc01_e.pdf, ComponentLink2Description="DigiKey Link", ComponentLink2URL=http://digikey.com/product-detail/en/taiyo-yuden/TMK107B7105KA-T/587-2984-1-ND/2714177, LastUpdated="2/9/2020 01:03:30", Lifecycle Status=Active, Minimum Order=1, Mounting Type="Surface Mount, MLCC", Package / Case="0603 (1608 Metric)", Packaging=TapeAndReel, Part Number=TMK107B7105KA-T, Part Status=Active, PartId=5586, Price=0.01, Series=M, Size / Dimension="0.063\" L x 0.031\" W (1.60mm x 0.80mm)", Supplier 1=DigiKey, Thickness (Max)="0.035\" (0.90mm)"
C13: library part CC0603KRX7R7BB105, "CAP CER 1UF 16V X7R 0603", Device Package="0603 (1608 Metric)", Manufacturer=Yageo, Operating Temperature="-55°C ~ 125°C", Supplier Part Number 1=311-1446-1-ND, Temperature Coefficient=X7R, Tolerance=±10%, Voltage - Rated=16V, Applications="General Purpose", Capacitance=1µF, ComponentLink1Description=Datasheet, ComponentLink1URL=https://www.yageo.com/upload/media/product/productsearch/datasheet/mlcc/UPY-GPHC_X7R_6.3V-to-50V_18.pdf, ComponentLink2Description="DigiKey Link", ComponentLink2URL=http://digikey.com/product-detail/en/yageo/CC0603KRX7R7BB105/311-1446-1-ND/2833752, LastUpdated="2/9/2020 01:03:31", Lifecycle Status=Active, Minimum Order=1, Mounting Type="Surface Mount, MLCC", Package / Case="0603 (1608 Metric)", Packaging=TapeAndReel, Part Number=CC0603KRX7R7BB105, Part Status=Active, PartId=5233, Price=0.01, Series=CC, Size / Dimension="0.063\" L x 0.031\" W (1.60mm x 0.80mm)", Supplier 1=DigiKey, Thickness (Max)="0.035\" (0.90mm)"
C18 C19 C22: library part T491D106K050AT, "CAP TANT 10UF 10% 50V 2917", Device Package="2917 (7343 Metric)", ESR (Equivalent Series Resistance)=800mOhm, Lifetime @ Temp.="2000 Hrs @ 125°C", Manufacturer=KEMET, Manufacturer Size Code=D, Operating Temperature="-55°C ~ 125°C", Supplier Part Number 1=399-8361-1-ND, Tolerance=±10%, Voltage - Rated=50V, Capacitance=10µF, ComponentLink1Description=Datasheet, ComponentLink1URL=https://api.kemet.com/component-edge/download/datasheet/T491D106K050AT.pdf, ComponentLink2Description="DigiKey Link", ComponentLink2URL=http://digikey.com/product-detail/en/kemet/T491D106K050AT/399-8361-1-ND/3472084, Features="General Purpose", Height - Seated (Max)="0.122\" (3.10mm)", LastUpdated="2/9/2020 01:16:12", Lifecycle Status=Active, Minimum Order=1, Mounting Type="Surface Mount", Package / Case="2917 (7343 Metric)", Packaging=TapeAndReel, Part Number=T491D106K050AT, Part Status=Active, PartId=3121, Price=0.86, Series=T491, Size / Dimension="0.287\" L x 0.169\" W (7.30mm x 4.30mm)", Supplier 1=DigiKey, Type=Molded
C20 C23: library part UMK325C7106MM-T, "CAP CER 10UF 50V X7S 1210", Device Package="1210 (3225 Metric)", Manufacturer="Taiyo Yuden", Operating Temperature="-55°C ~ 125°C", Supplier Part Number 1=587-1818-1-ND, Temperature Coefficient=X7S, Tolerance=±20%, Voltage - Rated=50V, Applications="General Purpose", Capacitance=10µF, ComponentLink1Description=Datasheet, ComponentLink1URL=//media.digikey.com/pdf/Data%20Sheets/Taiyo%20Yuden%20PDFs%20URL%20links/UMK325C7106MM-T.pdf, ComponentLink2Description="DigiKey Link", ComponentLink2URL=http://digikey.com/product-detail/en/taiyo-yuden/UMK325C7106MM-T/587-1818-1-ND/1465288, LastUpdated="2/9/2020 01:10:51", Lifecycle Status=Active, Minimum Order=1, Mounting Type="Surface Mount, MLCC", Package / Case="1210 (3225 Metric)", Packaging=TapeAndReel, Part Number=UMK325C7106MM-T, Part Status=Active, PartId=23921, Price=0.21, Series=M, Size / Dimension="0.126\" L x 0.098\" W (3.20mm x 2.50mm)", Supplier 1=DigiKey, Thickness (Max)="0.106\" (2.70mm)"
C21 C24: library part UMK212B7224KG-T, "CAP CER 0.22UF 50V X7R 0805", Device Package="0805 (2012 Metric)", Manufacturer="Taiyo Yuden", Operating Temperature="-55°C ~ 125°C", Supplier Part Number 1=587-1287-1-ND, Temperature Coefficient=X7R, Tolerance=±10%, Voltage - Rated=50V, Applications="General Purpose", Capacitance=0.22µF, ComponentLink1Description=Datasheet, ComponentLink1URL=https://www.yuden.co.jp/productdata/catalog/mlcc01_e.pdf, ComponentLink2Description="DigiKey Link", ComponentLink2URL=http://digikey.com/product-detail/en/taiyo-yuden/UMK212B7224KG-T/587-1287-1-ND/931064, LastUpdated="2/9/2020 01:04:19", Lifecycle Status=Active, Minimum Order=1, Mounting Type="Surface Mount, MLCC", Package / Case="0805 (2012 Metric)", Packaging=TapeAndReel, Part Number=UMK212B7224KG-T, Part Status=Active, PartId=14273, Price=0.03, Series=M, Size / Dimension="0.079\" L x 0.049\" W (2.00mm x 1.25mm)", Supplier 1=DigiKey, Thickness (Max)="0.053\" (1.35mm)"
C25: library part 06035A101FAT2A, "CAP CER 100PF 50V C0G/NP0 0603", Device Package="0603 (1608 Metric)", Manufacturer="AVX Corporation", Operating Temperature="-55°C ~ 125°C", Supplier Part Number 1=478-6202-1-ND, Temperature Coefficient="C0G, NP0", Tolerance=±1%, Voltage - Rated=50V, Applications="General Purpose", Capacitance=100pF, ComponentLink1Description=Datasheet, ComponentLink1URL=http://datasheets.avx.com/C0GNP0-Dielectric.pdf, ComponentLink2Description="DigiKey Link", ComponentLink2URL=http://digikey.com/product-detail/en/avx-corporation/06035A101FAT2A/478-6202-1-ND/2391401, LastUpdated="2/9/2020 01:03:14", Lifecycle Status=Active, Minimum Order=1, Mounting Type="Surface Mount, MLCC", Package / Case="0603 (1608 Metric)", Packaging=TapeAndReel, Part Number=06035A101FAT2A, Part Status=Active, PartId=14099, Price=0.03, Series=-, Size / Dimension="0.063\" L x 0.032\" W (1.60mm x 0.81mm)", Supplier 1=DigiKey, Thickness (Max)="0.035\" (0.90mm)"
D1: library part C6D06065A, "Sic Schottky Diode, VRRM = 650V. IF= 6A", Manufacturer="Cree Wolfspeed", Supplier Part Number 1=1697-C6D06065A-ND, Cagetory="Schottly Diode", Manufacturer Part Number=C6D06065A, Pricing 1="1=1,80000 (USD)", RoHS=No, Stock 1=376, Supplier 1=Digi-Key
D2: "PMEG6010CEH; PMEG6010CEJ - 1 A very low VF MEGA Schottky barrier rectifiers", Manufacturer=Nexperia, Supplier Part Number 1=1727-3882-1-ND, Category="Rectifier Diodes", ComponentLink1Description=https://www.mouser.com/ds/2/302/PMEG6010CEH_PMEG6010CEJ-102368.pdf?src-supplier=Mouser, ComponentLink1URL=https://www.mouser.com/ds/2/302/PMEG6010CEH_PMEG6010CEJ-102368.pdf?src-supplier=Mouser, ComponentLink2Description=http://www.farnell.com/datasheets/109684.pdf?src-supplier=Farnell, ComponentLink2URL=http://www.farnell.com/datasheets/109684.pdf?src-supplier=Farnell, ComponentLink3Description=http://www.farnell.com/datasheets/109684.pdf?src-supplier=Newark, ComponentLink3URL=http://www.farnell.com/datasheets/109684.pdf?src-supplier=Newark, ComponentLink4Description=https://assets.nexperia.com/documents/data-sheet/PMEG6010CEH_PMEG6010CEJ.pdf?src-supplier=Digi-Key, ComponentLink4URL=https://assets.nexperia.com/documents/data-sheet/PMEG6010CEH_PMEG6010CEJ.pdf?src-supplier=Digi-Key, Manufacturer Part Number=PMEG6010CEJ,115, Pricing 1="1=0,35000, 10=0,27200, 100=0,16340, 500=0,15128, 1000=0,10288 (USD)", RoHS=Yes, Stock 1=105369, Supplier 1=Digi-Key
D3 D4: library part 150060GS75000, "LED GREEN CLEAR 0603 SMD", Current - Test=20mA, Device Package="0603 (1608 Metric)", Lens Color=Colorless, Manufacturer="Würth Elektronik", Millicandela Rating=430mcd, Supplier Device Package=0603, Supplier Part Number 1=732-4971-1-ND, Voltage - Forward (Vf) (Typ)=3.2V, Color=Green, ComponentLink1Description=Datasheet, ComponentLink1URL=https://katalog.we-online.de/led/datasheet/150060GS75000.pdf, ComponentLink2Description="DigiKey Link", ComponentLink2URL=http://digikey.com/product-detail/en/w-rth-elektronik/150060GS75000/732-4971-1-ND/4489896, Configuration=Standard, Height (Max)=0.80mm, LastUpdated="2/9/2020 01:20:41", Lens Size="1.10mm x 0.70mm", Lens Style="Rectangle with Flat Top", Lens Transparency=Clear, Lifecycle Status=Active, Minimum Order=1, Mounting Type="Surface Mount", Package / Case="0603 (1608 Metric)", Packaging=TapeAndReel, Part Number=150060GS75000, Part Status=Active, PartId=686, Price=0.10, Series=WL-SMCW, Size / Dimension="1.60mm L x 0.80mm W", Supplier 1=DigiKey, Viewing Angle=140°, Wavelength - Dominant=520nm, Wavelength - Peak=515nm
D5: "BOURNS - SMAJ5.0A - TVS Diode, SMAJ Series, Unidirectional, 5 V, 9.2 V, DO-214AC (SMA), 2 Pins", Breakdown Voltage=7V, Case/Package=DO-214AC, Clamping Voltage=9.2V, Leakage Current=800uA, Manufacturer=Bourns, Max Operating Temperature=150°C, Max Power Dissipation=400W, Max Surge Current=40A, Min Breakdown Voltage=6.4V, Min Operating Temperature=-55°C, Operating Supply Voltage=3.5V, Package Quantity=1, Peak Pulse Current=43.5A, Power Line Protection=No, Resistor Type=Zener, Reverse Standoff Voltage=5V, Supplier Part Number 1=SMAJ5.0ABCT-ND, Test Current=10mA, Category="TVS Diodes", ComponentLink1Description=https://datasheet.ciiva.com/25624/0900766b8112213b-25624680.pdf?src-supplier=RSComponents, ComponentLink1URL=https://datasheet.ciiva.com/25624/0900766b8112213b-25624680.pdf?src-supplier=RSComponents, ComponentLink2Description=https://datasheet.ciiva.com/333/smaj-333521.pdf?src-supplier=Digi-Key, ComponentLink2URL=https://datasheet.ciiva.com/333/smaj-333521.pdf?src-supplier=Digi-Key, ComponentLink3Description=https://datasheet.ciiva.com/333/smaj-333522.pdf?src-supplier=Digi-Key, ComponentLink3URL=https://datasheet.ciiva.com/333/smaj-333522.pdf?src-supplier=Digi-Key, ComponentLink4Description=https://datasheet.ciiva.com/333/smaj-333523.pdf?src-supplier=Digi-Key, ComponentLink4URL=https://datasheet.ciiva.com/333/smaj-333523.pdf?src-supplier=Digi-Key, ComponentLink5Description=https://datasheet.ciiva.com/3021/smaj-3021400.pdf?src-supplier=Avnet, ComponentLink5URL=https://datasheet.ciiva.com/3021/smaj-3021400.pdf?src-supplier=Avnet, ComponentLink6Description=https://datasheet.ciiva.com/30169/smaj-30169929.pdf?src-supplier=Onlinecomponents.com, ComponentLink6URL=https://datasheet.ciiva.com/30169/smaj-30169929.pdf?src-supplier=Onlinecomponents.com, ComponentLink7Description=https://datasheet.ciiva.com/28409/1695388-28409916.pdf?src-supplier=Element14, ComponentLink7URL=https://datasheet.ciiva.com/28409/1695388-28409916.pdf?src-supplier=Element14, Diode Type=ZENER, Direction=Unidirectional, Element Configuration=Single, ESD Protection=Yes, Height=2.42mm, Length=4.57mm, Manufacturer Part Number=SMAJ5.0A, Max Breakdown Voltage=7V, Max Reverse Leakage Current=800uA, Mount="Surface Mount", Number of Channels=1, Number of Elements=1, Number of Pins=2, Number of Unidirectional Channels=1, Packaging="Tape and Reel", Peak Pulse Power=400W, Polarity=Unidirectional, Pricing 1="1=0,49000, 10=0,34300, 100=0,17320, 500=0,14130, 1000=0,10483, 2000=0,08820 (USD)", Radiation Hardening=No, REACH SVHC="No SVHC", Reverse Breakdown Voltage=6.4V, RoHS=Yes, RoHS Compliant=Yes, Series=SMAJ, Stock 1=30981, Supplier 1=Digi-Key, Termination=SMD/SMT, Width=2.92mm
D6: "TVS DIODE 16VWM 26VC DO214AC", Breakdown Voltage=19.7V, Case/Package=DO-214AC, Clamping Voltage=26V, Leakage Current=5uA, Manufacturer=Bourns, Max Operating Temperature=150°C, Max Power Dissipation=400W, Max Surge Current=40A, Min Breakdown Voltage=17.8V, Min Operating Temperature=-55°C, Operating Supply Voltage=3.5V, Package Quantity=1, Peak Pulse Current=15.3A, Power Line Protection=No, Resistor Type=Zener, Reverse Standoff Voltage=16V, Supplier Part Number 1=SMAJ16ABCT-ND, Test Current=1mA, Category="TVS Diodes", ComponentLink1Description=https://datasheet.ciiva.com/3022/smaj-3022194.pdf?src-supplier=Avnet, ComponentLink1URL=https://datasheet.ciiva.com/3022/smaj-3022194.pdf?src-supplier=Avnet, ComponentLink2Description=https://datasheet.ciiva.com/3022/smaj-3022195.pdf?src-supplier=Avnet, ComponentLink2URL=https://datasheet.ciiva.com/3022/smaj-3022195.pdf?src-supplier=Avnet, ComponentLink3Description=https://datasheet.ciiva.com/8031/1695388-8031131.pdf?src-supplier=Element14, ComponentLink3URL=https://datasheet.ciiva.com/8031/1695388-8031131.pdf?src-supplier=Element14, ComponentLink4Description=https://datasheet.ciiva.com/28649/1695388-28649163.pdf?src-supplier=Element14, ComponentLink4URL=https://datasheet.ciiva.com/28649/1695388-28649163.pdf?src-supplier=Element14, ComponentLink5Description=https://datasheet.ciiva.com/333/smaj-333452.pdf?src-supplier=Digi-Key, ComponentLink5URL=https://datasheet.ciiva.com/333/smaj-333452.pdf?src-supplier=Digi-Key, ComponentLink6Description=https://datasheet.ciiva.com/333/smaj-333453.pdf?src-supplier=Digi-Key, ComponentLink6URL=https://datasheet.ciiva.com/333/smaj-333453.pdf?src-supplier=Digi-Key, ComponentLink7Description=https://datasheet.ciiva.com/17413/smaj-17413677.pdf?src-supplier=Avnet+Europe, ComponentLink7URL=https://datasheet.ciiva.com/17413/smaj-17413677.pdf?src-supplier=Avnet+Europe, ComponentLink8Description=https://datasheet.ciiva.com/333/smaj-333454.pdf?src-supplier=Digi-Key, ComponentLink8URL=https://datasheet.ciiva.com/333/smaj-333454.pdf?src-supplier=Digi-Key, ComponentLink9Description=https://datasheet.ciiva.com/16237/smaj-16237406.pdf?src-supplier=Onlinecomponents.com, ComponentLink9URL=https://datasheet.ciiva.com/16237/smaj-16237406.pdf?src-supplier=Onlinecomponents.com, Diode Type=ZENER, Direction=Unidirectional, Element Configuration=Single, Manufacturer Part Number=SMAJ16A, Max Breakdown Voltage=19.7V, Max Reverse Leakage Current=5uA, Mount="Surface Mount", Number of Channels=1, Number of Elements=1, Number of Pins=2, Number of Unidirectional Channels=1, Packaging="Tape and Reel", Peak Pulse Power=400W, Polarity=Unidirectional, Pricing 1="1=0,49000, 10=0,34400, 100=0,17360, 500=0,14160, 1000=0,10505, 2000=0,08838 (USD)", Radiation Hardening=No, REACH SVHC="No SVHC", Reverse Breakdown Voltage=17.8V, RoHS=Yes, RoHS Compliant=Yes, Series=SMAJ, Stock 1=14121, Supplier 1=Digi-Key, Termination=SMD/SMT
F1: "Fuse Holder, 400 V, 16 A, TH", Manufacturer=Schurter, Supplier Part Number 1=486-1159-ND, ComponentLink1Description="Datasheet Link", ComponentLink1URL=http://www.schurterinc.com/var/schurter/storage/ilcatalogue/files/document/datasheet/en/pdf/typ_FPG4.pdf, CompType="Fuse Holder", LatestRevisionDate=2016-05-10, MountType=TH, PackageReference="Fuse Holder for 5x20mm", PartNumber=3101.0040, Publisher="Texas Instruments", RoHS=Y, Supplier 1=Digi-Key, Supplier 2=Mouser, Supplier 3=Farnell, Supplier Part Number 2=693-3101.0040, Supplier Part Number 3=1222690, SymbolCreator=a0799628, SymbolVersion=2014-05-01
H1 H2: library part 6399BG, "AAVID THERMALLOY         6399BG            Heat Sink, TO-220/218, TO-220, 3.3 C/W, 50 mm, 41.91 mm, 25.4 mm", Case/Package=TO-220, Color=Black, Manufacturer="Aavid Thermalloy", Natural Thermal Resistance=3.3°C/W, Package Quantity=250, Supplier Part Number 1=HS528-ND, Category="Heat Sinks", ComponentLink1Description=https://datasheet.ciiva.com/26826/getdatasheetpartid-556672-26826808.pdf?src-supplier=Verical, ComponentLink1URL=https://datasheet.ciiva.com/26826/getdatasheetpartid-556672-26826808.pdf?src-supplier=Verical, ComponentLink2Description=https://datasheet.ciiva.com/16401/aavid20thermalloy206399bg-16401195.pdf?src-supplier=Future+Electronics, ComponentLink2URL=https://datasheet.ciiva.com/16401/aavid20thermalloy206399bg-16401195.pdf?src-supplier=Future+Electronics, Depth=25.4mm, Finish=Anodized, Height=50.8mm, Lead Free="Lead Free", Length=41.91mm, Manufacturer Part Number=6399BG, Material=Anodized, Pricing 1="1=6,20000, 10=6,02800, 25=5,69320, 50=5,35840, 100=5,02350, 250=4,68860, 500=4,35370, 1000=4,26998, 5000=4,18625 (USD)", Radiation Hardening=No, REACH SVHC="No SVHC", RoHS=Yes, RoHS Compliant=Yes, Stock 1=1442, Supplier 1=Digi-Key, Type=Passive, Width=41.91mm
H3 H4 H5 H6 H11 H12: library part CMP-0003640-1, "Standoff, Hex,25mm Length, M3, Aluminum", Manufacturer=Keystone, Supplier Part Number 1=36-24438-ND, ComponentLink1Description="Datasheet Link", ComponentLink1URL=http://www.keyelco.com/userAssets/file/M60-2p72.pdf, CompType=Hardware, Key=24438, LatestRevisionDate=2017-03-09, MountType=TH, PackageReference="Standoff M3", PartNumber=24438, Publisher="Texas Instruments", RoHS=Y, Supplier 1=Digi-Key, Supplier 2=Mouser, Supplier Part Number 2=534-24438
H7 H8 H9 H10 H13 H14: library part CMP-0003646-1, "MACHINE SCREW PAN PHILLIPS M3 5mm", Manufacturer="B&F Fastener Supply", Supplier Part Number 1=H742-ND, ClassName=Screw, ComponentLink1Description="Datasheet Link", ComponentLink1URL=http://www.fasnetdirect.com/refguide/MetD7985a.pdf, CompType=Hardware, Key="MPMS 003 0005 PH", LatestRevisionDate=2017-03-09, MountType=N/A, PackageReference="Screw M3 Phillips head", PartNumber="MPMS 003 0005 PH", Publisher="Texas Instruments", RoHS=Y, Supplier 1=Digi-Key
J1 J2 J3 J5 J6 J7 J8: library part 62409-1, "Quick Disconnect Terminal M 15.8mm 7.5mm Tin Over Copper Automotive Bag", Manufacturer="AMP - TE CONNECTIVITY", Supplier Part Number 1=A24742-ND, ComponentLink1Description=http://www.farnell.com/datasheets/1650963.pdf?src-supplier=Farnell, ComponentLink1URL=http://www.farnell.com/datasheets/1650963.pdf?src-supplier=Farnell, ComponentLink2Description=http://www.farnell.com/datasheets/1650963.pdf?src-supplier=Element14, ComponentLink2URL=http://www.farnell.com/datasheets/1650963.pdf?src-supplier=Element14, ComponentLink3Description=http://www.farnell.com/datasheets/1650963.pdf?src-supplier=Newark, ComponentLink3URL=http://www.farnell.com/datasheets/1650963.pdf?src-supplier=Newark, ComponentLink4Description=https://www.te.com/commerce/DocumentDelivery/DDEController?Action=srchrtrv&DocNm=62409&DocType=Customer+Drawing&DocLang=English&src-supplier=Digi-Key, ComponentLink4URL=https://www.te.com/commerce/DocumentDelivery/DDEController?Action=srchrtrv&DocNm=62409&DocType=Customer+Drawing&DocLang=English&src-supplier=Digi-Key, Manufacturer Part Number=62409-1, Pricing 1="1=0,19000, 10=0,17800, 25=0,15200, 50=0,13320, 100=0,12360, 250=0,10936, 750=0,09035, 1500=0,08083, 8000=0,06895 (USD)", RoHS=No, Stock 1=8729, Supplier 1=Digi-Key
J4: library part 8PCV-02-006, "Barrier Terminal Blocks VERTICAL RAISED 2P", Color=Black, Current Rating=30A, Flammability Rating="UL94 V-0", Manufacturer="TE Connectivity", Max Operating Temperature=248°C, Max Voltage Rating (AC)=600V, Min Operating Temperature=-40°C, Package Quantity=270, Supplier Part Number 1=A98460-ND, Category="Terminal Blocks", ComponentLink1Description=https://datasheet.ciiva.com/30214/8pcv02006-30214903.pdf?src-supplier=Onlinecomponents.com, ComponentLink1URL=https://datasheet.ciiva.com/30214/8pcv02006-30214903.pdf?src-supplier=Onlinecomponents.com, ComponentLink2Description=https://datasheet.ciiva.com/11746/0900766b80fa362c-11746107.pdf?src-supplier=RSComponents, ComponentLink2URL=https://datasheet.ciiva.com/11746/0900766b80fa362c-11746107.pdf?src-supplier=RSComponents, ComponentLink3Description=https://datasheet.ciiva.com/5181/eng-cd-6-1437657-3-k4-5181165.pdf?src-supplier=Mouser, ComponentLink3URL=https://datasheet.ciiva.com/5181/eng-cd-6-1437657-3-k4-5181165.pdf?src-supplier=Mouser, Contact Material="Copper Alloy", Contact Plating=Tin, Depth=0.77inch, ELV=Compliant, Height=0.77inch, Housing Material=Thermoplastic, Insulation Material=Thermoplastic, Length=24.07mm, Manufacturer Part Number=8PCV-02-006, Material=Thermoplastic, Max Current Rating=30A, Mount="Through Hole", Mounting Ears="No (Without)", Mounting Insert="No (Without)", Number of Circuits=2, Number of Contacts=2, Number of Levels=1, Number of Positions=2, Number of Rows=1, Number of Wire Entries=2, Orientation=Straight, Pitch=11.1mm, Pricing 1="1=1,84000, 10=1,29200, 25=1,20480, 50=1,09360, 100=1,08880, 250=0,91940, 500=0,87102, 1000=0,77424, 5000=0,62907 (USD)", RoHS=Yes, RoHS Compliant=Yes, Series="#8, Buchanan", Stock 1=4811, Supplier 1=Digi-Key, Terminal Material="Copper Alloy", Termination=Screw, Thread Size=M4, Voltage=600V, Voltage Rating=600V, Width=0.8inch, Wire Gauge (Max)=18AWG, Wire Gauge (Min)=10AWG, Wire/Cable Gauge=10AWG